# EAGLE board Light Intensity Measurement using LDR Sensor (EAGLE 9.7.0)

Size 197.15 x 102.12 mm. Coordinates in mm from the lower left corner, seen from the top.
Outline: 0,0 197.15,0 197.15,102.12 0,102.12 0,0
Copper layers (1*16): Top 0.035mm / dielectric 1.5mm / Bottom 0.035mm
Design rules "default": minimum track width 6mil, minimum drill 0.35mm, track to track 6mil, track to pad 6mil, pad to pad 6mil, via to via 6mil, smd to smd 6mil, copper to edge 40mil, drill to drill 6mil, minimum pad ring 10mil, minimum via ring 8mil, stop-mask expansion 4mil, vias tented up to drill 0mil, thermal gap 10mil

## Footprints (pad centres in the part's own frame; a part is rotated, then mirrored left to right if it is on the bottom)
LED-RGB-5MM = drill 0.9: B 0.635,0.635; C -0.635,-0.635; G 1.905,-0.635; R -1.905,0.635
GL5528 = drill 0.8 pad 1.4: 1 -1.702,0; 2 1.702,0
RESAD1016W63L850D250B = drill 0.83 pad 1.43: 1 -5.08,0; 2 5.08,0
ARDUINO-UNO-R3-SHIELD = drill 1.016 pad 1.88: 3.3V 24.13,-2.54; 5V 24.13,0; A0 24.13,12.7; A1 24.13,15.24; A2 24.13,17.78; A3 24.13,20.32; A4 24.13,22.86; A5 24.13,25.4; AREF -24.13,-13.97; D2 -24.13,20.32; D3 -24.13,17.78; D4 -24.13,15.24; D5 -24.13,12.7; D6 -24.13,10.16; D7 -24.13,7.62; D8 -24.13,3.81; D9 -24.13,1.27; D10 -24.13,-1.27; D11 -24.13,-3.81; D12 -24.13,-6.35; D13 -24.13,-8.89; GND@0 24.13,2.54; GND@1 24.13,5.08; GND@2 -24.13,-11.43; IOREF 24.13,-7.62; NC 24.13,-10.16; RES 24.13,-5.08; RX -24.13,25.4; SCL -24.13,-19.05; SDA -24.13,-16.51; TX -24.13,22.86; VIN 24.13,7.62
JHD-162A = drill 1.016 long: 1 -19.05,0; 2 -16.51,0; 3 -13.97,0; 4 -11.43,0; 5 -8.89,0; 6 -6.35,0; 7 -3.81,0; 8 -1.27,0; 9 1.27,0; 10 3.81,0; 11 6.35,0; 12 8.89,0; 13 11.43,0; 14 13.97,0; 15 16.51,0; 16 19.05,0

## Placement (x,y rotation side)
DRGB_VISUALISER  LED-RGBRCBG-PTH  [LED-RGB-5MM]  117.07,43.27 0 top
RLDR_SENSOR  PHOTOCELL_GL5528  [GL5528]  99.29,25.49 0 top
RRESISTOR_(B)  220  [RESAD1016W63L850D250B]  115.8,35.65 0 top
RRESISTOR_(G)  220  [RESAD1016W63L850D250B]  113.26,38.19 0 top
RRESISTOR_(LDR)  4k  [RESAD1016W63L850D250B]  105.64,17.87 0 top
RRESISTOR_(R)  220  [RESAD1016W63L850D250B]  108.18,40.73 0 top
U1  ARDUINO-UNO-R3-SHIELD  [ARDUINO-UNO-R3-SHIELD]  47.88,29.84 270 top
ULCD_VISUALIZER  LCD-16X2JHD-162A  [JHD-162A]  141.53,94.57 0 top

## Library data of the parts
DRGB_VISUALISER RLDR_SENSOR RRESISTOR_(B) RRESISTOR_(G) RRESISTOR_(LDR) RRESISTOR_(R) U1 ULCD_VISUALIZER = Tinkercad

## Nets
DRGB_VISUALISER_B: DRGB_VISUALISER.B RRESISTOR_(G).2
DRGB_VISUALISER_G: DRGB_VISUALISER.G RRESISTOR_(B).2
DRGB_VISUALISER_R: DRGB_VISUALISER.R RRESISTOR_(R).2
U1_5V: RLDR_SENSOR.1 U1.5V ULCD_VISUALIZER.2 ULCD_VISUALIZER.15
U1_A0: RLDR_SENSOR.2 RRESISTOR_(LDR).1 U1.A0
U1_D2: U1.D2 ULCD_VISUALIZER.14
U1_D3: U1.D3 ULCD_VISUALIZER.13
U1_D4: U1.D4 ULCD_VISUALIZER.12
U1_D5: RRESISTOR_(B).1 U1.D5
U1_D6: RRESISTOR_(G).1 U1.D6
U1_D7: U1.D7 ULCD_VISUALIZER.11
U1_D9: U1.D9 ULCD_VISUALIZER.6
U1_D10: U1.D10 ULCD_VISUALIZER.4
U1_D11: RRESISTOR_(R).1 U1.D11
U1_GND: DRGB_VISUALISER.C RRESISTOR_(LDR).2 U1.GND@0 U1.GND@1 U1.GND@2 ULCD_VISUALIZER.1 ULCD_VISUALIZER.3 ULCD_VISUALIZER.5 ULCD_VISUALIZER.16

## Tracks (layer width: path | path; a pad name or v marks a point on that pad's centre or on a via)
DRGB_VISUALISER_B  (1 unrouted)
DRGB_VISUALISER_G  (1 unrouted)
DRGB_VISUALISER_R  (1 unrouted)
U1_5V  (3 unrouted)
U1_A0  (2 unrouted)
U1_D2  (1 unrouted)
U1_D3  (1 unrouted)
U1_D4  (1 unrouted)
U1_D5  (1 unrouted)
U1_D6  (1 unrouted)
U1_D7  (1 unrouted)
U1_D9  (1 unrouted)
U1_D10  (1 unrouted)
U1_D11  (1 unrouted)
U1_GND  (8 unrouted)